# EAGLE board vco1_panel (EAGLE 7.6.0)
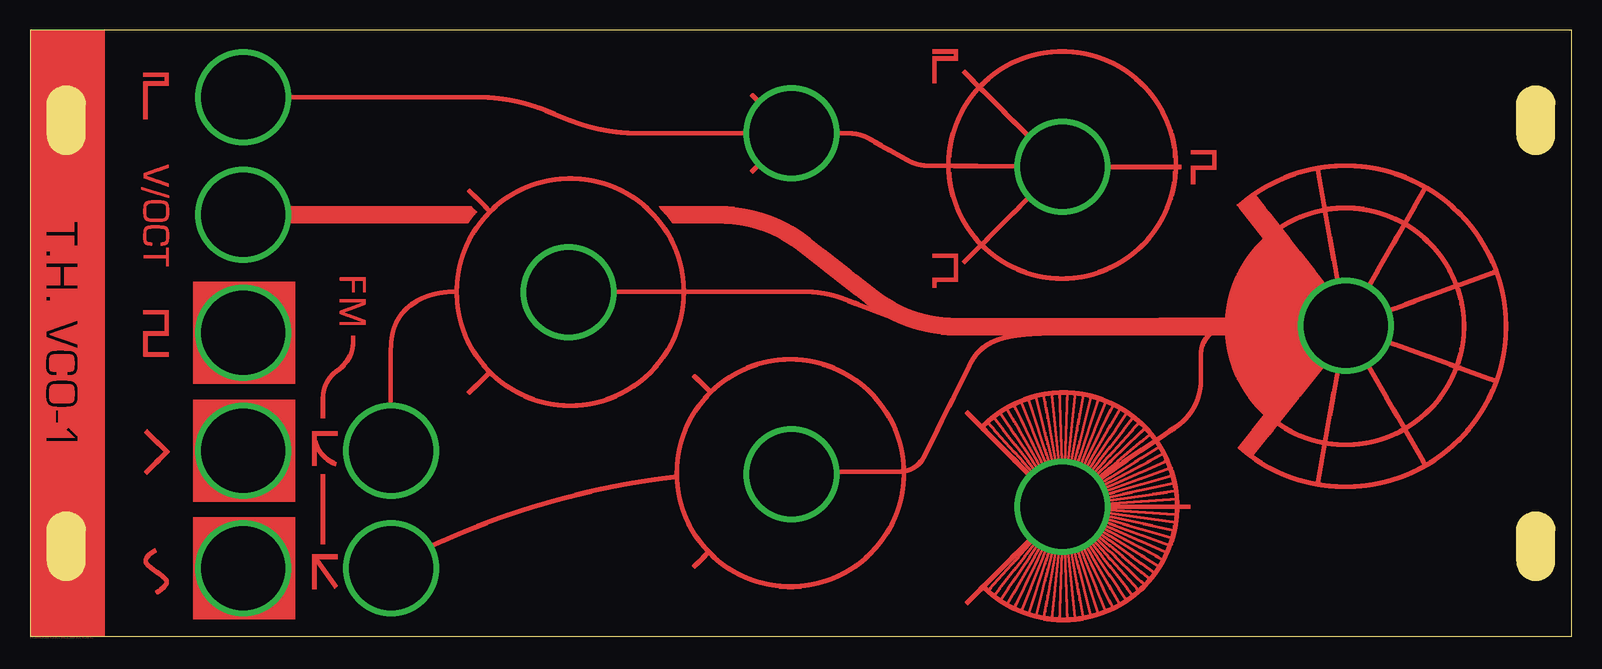
[diagram p0: board, top side]
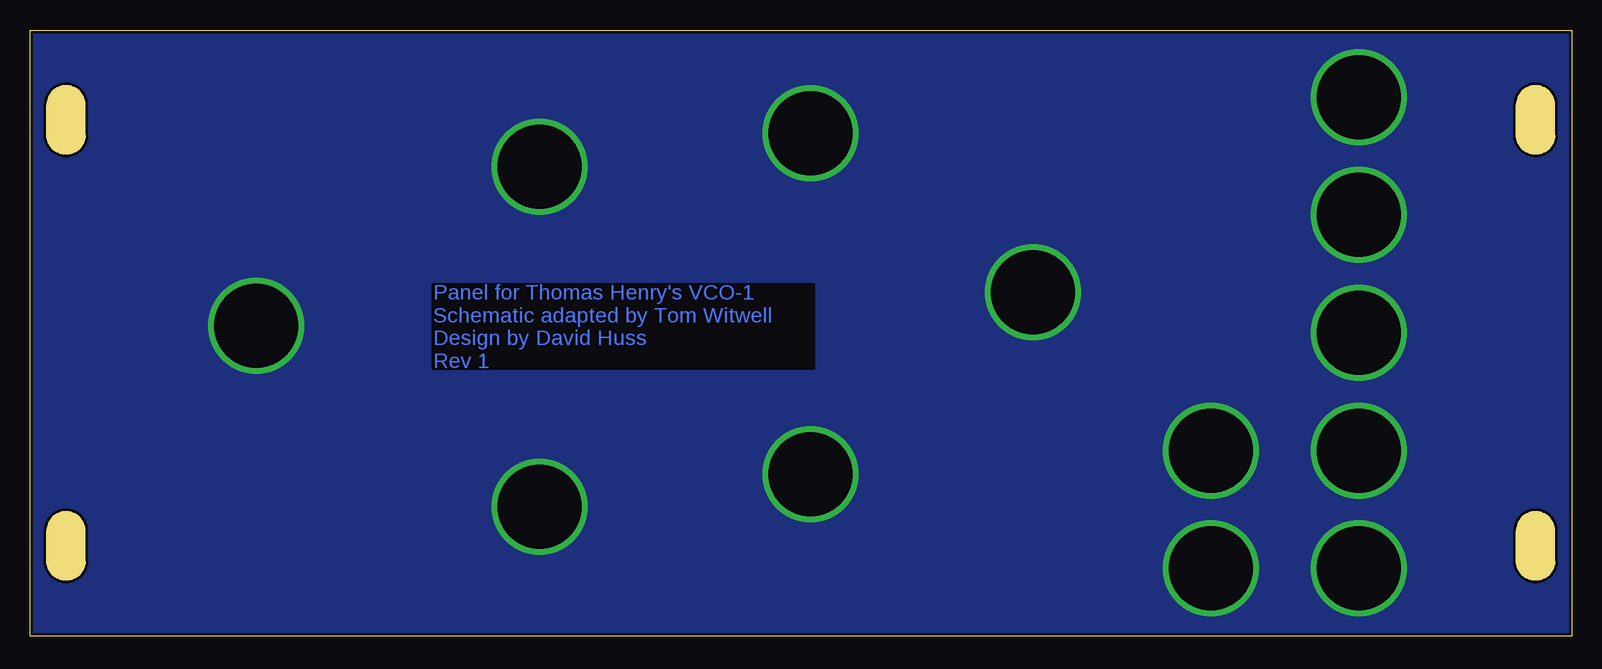
[diagram p1: board, bottom side, seen from below]

Size 128.5 x 50.5 mm. Coordinates in mm from the lower left corner, seen from the top.
Outline: 0,0 128.5,0 128.5,50.5 0,50.5 0,0
Copper layers (1*2*15*16): Top 0.035mm / dielectric 0.2mm / Route2 0.0175mm / dielectric 1.1mm / Route15 0.0175mm / dielectric 0.2mm / Bottom 0.035mm
Design rules "SeeedStudio_DRU_no_angle_20130527 *": minimum track width 6mil, minimum drill 12mil, track to track 6mil, track to pad 6mil, pad to pad 6mil, via to via 6mil, smd to smd 0mil, copper to edge 10mil, drill to drill 10mil, minimum pad ring 6mil, minimum via ring 1mil, stop-mask expansion 2mil, vias tented up to drill 25mil, thermal gap 10mil
Net classes: 1 power: width 0.406 mm; 2 ground: width 0.305 mm

## Placement (x,y rotation side)
U$1  [SLOT_HOLE]  3,43 90 top
U$2  [SLOT_HOLE]  125.5,43 90 top
U$3  [SLOT_HOLE]  3,7.5 90 top
U$4  [SLOT_HOLE]  125.5,7.5 90 top

## Library data of the parts
U$1-U$4 = MusicThingModular

## Tracks (layer width: path | path; a pad name or v marks a point on that pad's centre or on a via)
GND  (via drill 7)
  other vias: 17.74,44.91 17.74,35.09 17.74,25.28 17.74,15.46 17.74,5.64 30.08,15.46 30.08,5.64 44.89,28.63 63.45,41.91 63.45,13.49 86.04,39.09 86.04,10.78 109.66,25.86
  pour Bottom: -5,55.5 133.55,55.5 133.5,-5 -5,-5
(copper drawn outside any net)
  shapes: Top area x19334

## Text on the board
Top: D:/Text/Modular/TH-VCO1-master/Panel_Redesign_2/VCO1-Panel_Board-01.bmp
Bottom: Panel for Thomas Henry's VCO-1 / Schematic adapted by Tom Witwell / Design by David Huss / Rev 1